# EAGLE board Placa_SecadorDeGraos (EAGLE 9.2.0)
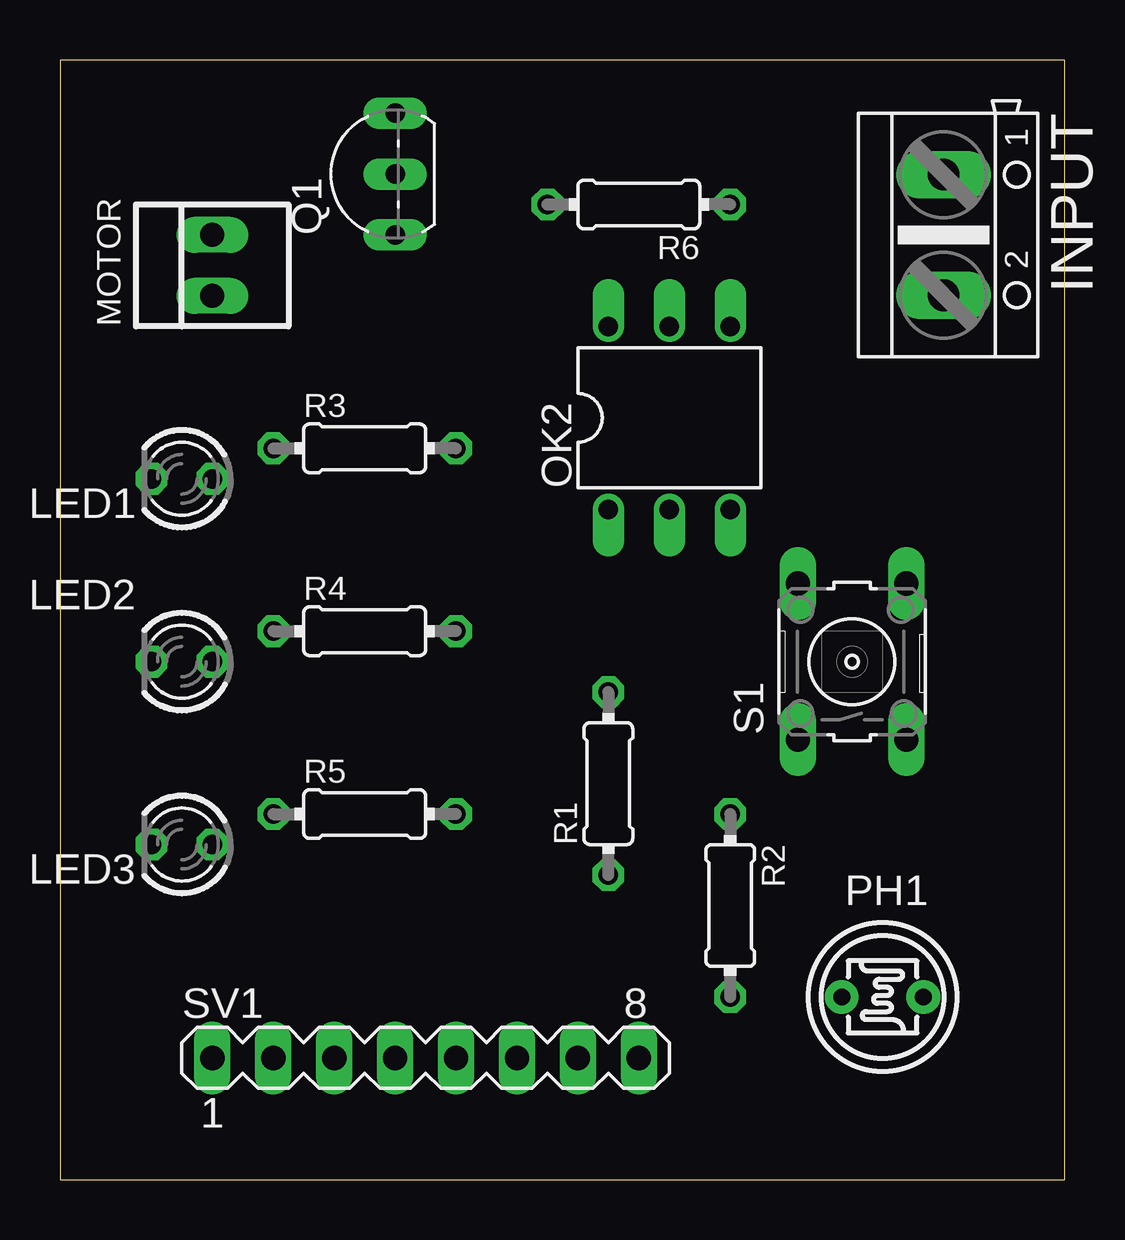
[diagram p0: board, top side]
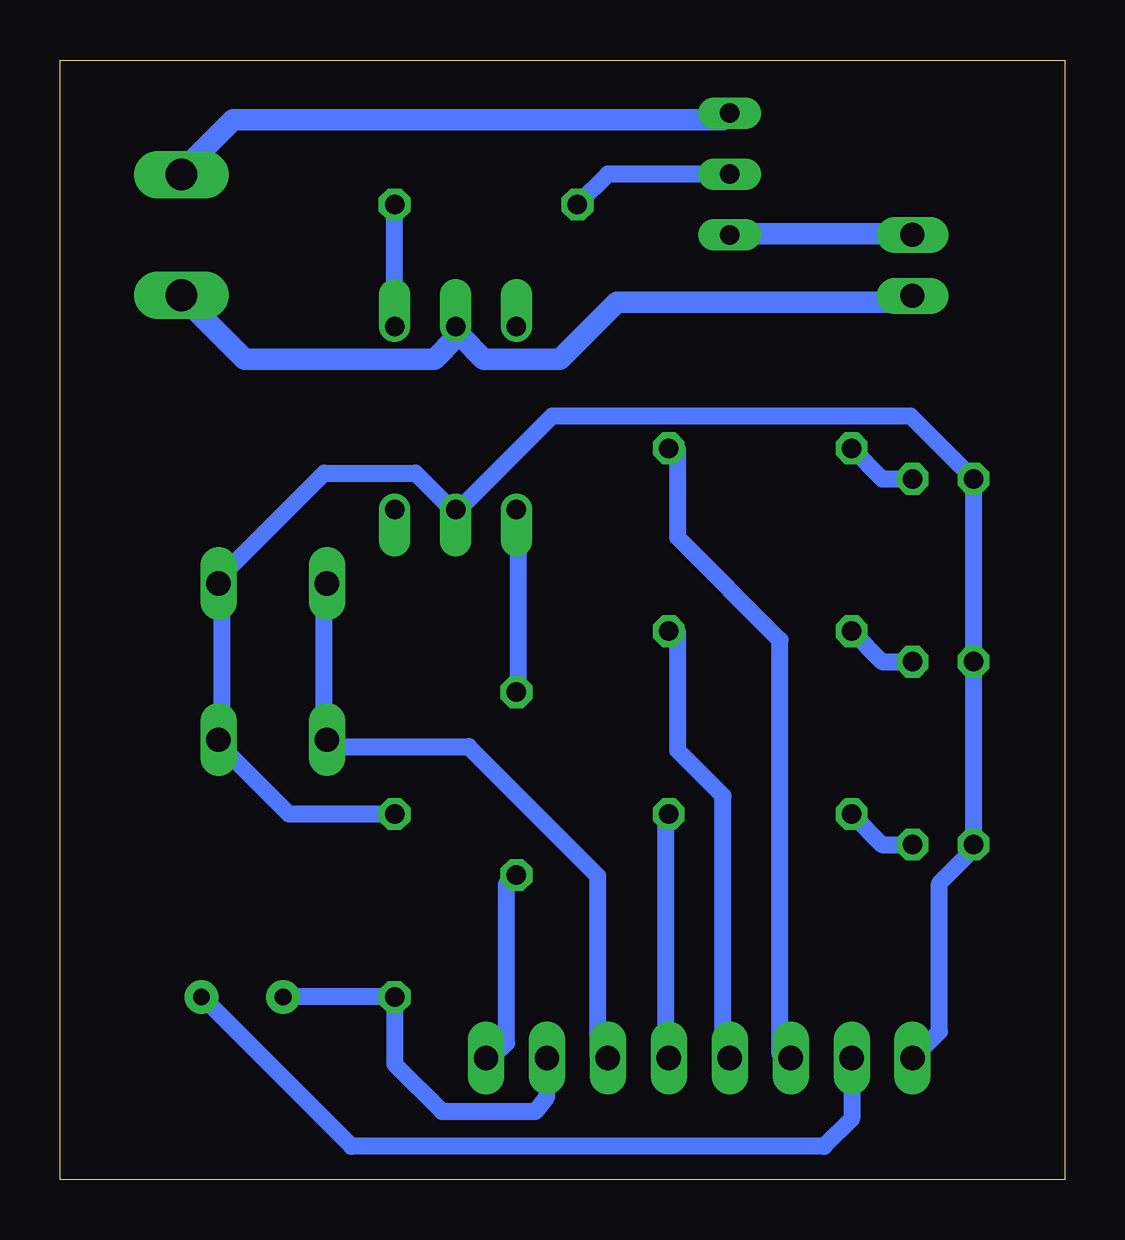
[diagram p1: board, bottom side, seen from below]

Size 41.89 x 46.66 mm. Coordinates in mm from the lower left corner, seen from the top.
Outline: 0,0 41.89,0 41.89,46.66 0,46.66 0,0
Copper layers (1*16): Top 0.035mm / dielectric 1.5mm / Bottom 0.035mm
Design rules "default *": minimum track width 0.7mm, minimum drill 0.7mm, track to track 0.25mm, track to pad 6mil, pad to pad 6mil, via to via 6mil, smd to smd 6mil, copper to edge 40mil, drill to drill 6mil, minimum pad ring 10mil, minimum via ring 8mil, stop-mask expansion 4mil, vias tented up to drill 0mil, thermal gap 10mil

## Footprints (pad centres in the part's own frame; a part is rotated, then mirrored left to right if it is on the bottom)
AK500/2 = drill 1.321 long: 1 -2.515,0; 2 2.515,0
LED3MM = drill 0.813 octagon: A -1.27,0; K 1.27,0
22-23-2021 = drill 1 long: 1 -1.27,0; 2 1.27,0
DIL06 = drill 0.813 offset: 1 -2.54,-3.81; 2 0,-3.81; 3 2.54,-3.81; 4 2.54,3.81; 5 0,3.81; 6 -2.54,3.81
T0-46-A10XX = drill 0.7 pad 1.4: 1 -1.7,0; 2 1.7,0
TO92-EBC = drill 0.813 long: B 0,-1.27; C -2.54,-1.27; E 2.54,-1.27
0204/7 = drill 0.813 octagon: 1 -3.81,0; 2 3.81,0
B3F-10XX = drill 1.016 long: 1 -3.251,2.261; 2 3.251,2.261; 3 -3.251,-2.261; 4 3.251,-2.261
MA08-1 = drill 1.016 long: 1 -8.89,0; 2 -6.35,0; 3 -3.81,0; 4 -1.27,0; 5 1.27,0; 6 3.81,0; 7 6.35,0; 8 8.89,0

## Placement (x,y rotation side)
INPUT  [AK500/2]  36.83,39.37 270 top
LED1  TLLG4400  [LED3MM]  5.08,29.21 180 top
LED2  TLLG4400  [LED3MM]  5.08,21.59 180 top
LED3  TLLG4400  [LED3MM]  5.08,13.97 180 top
MOTOR  22-23-2021  [22-23-2021]  6.35,38.1 90 top
OK2  4N35  [DIL06]  25.4,31.75 0 top
PH1  A1050_09  [T0-46-A10XX]  34.29,7.62 180 top
Q1  BC548  [TO92-EBC]  12.7,41.91 90 top
R1  [0204/7]  22.86,16.51 90 top
R2  [0204/7]  27.94,11.43 270 top
R3  [0204/7]  12.7,30.48 0 top
R4  [0204/7]  12.7,22.86 0 top
R5  [0204/7]  12.7,15.24 0 top
R6  [0204/7]  24.13,40.64 180 top
S1  [B3F-10XX]  33.02,21.59 90 top
SV1  [MA08-1]  15.24,5.08 0 top

## Library data of the parts
INPUT = con-ptr500; OC_FARNELL: unknown; OC_NEWARK: unknown
LED1-LED3 = led; MF: VISHAY SEMICONDUCTOR; OC_FARNELL: 1612435
MOTOR = con-molex; MF: MOLEX; MPN: 22-23-2021; OC_FARNELL: 1462926; OC_NEWARK: 25C3832
OK2 = optocoupler; MF: FAIRCHILD SEMICONDUCTOR; MPN: 4N35; OC_FARNELL: 1328375; OC_NEWARK: 72K9946
PH1 = photo-elements
Q1 = transistor-npn
R1-R6 = rcl; SPICEPREFIX: R
S1 = switch-omron; MPN: B3F-1000; OC_FARNELL: 176432; OC_NEWARK: 36M3542
SV1 = con-lstb; OC_FARNELL: unknown; OC_NEWARK: unknown

## Nets
+5V: PH1.1 SV1.2
CH1: S1.1 S1.2 SV1.6
DRV: R1.1 SV1.8
GND: LED1.K LED2.K LED3.K OK2.2 R2.1 S1.3 S1.4 SV1.1
L1: R3.2 SV1.3
L2: R4.2 SV1.4
L3: R5.2 SV1.5
LDR: PH1.2 R2.2 SV1.7
N$1: LED1.A R3.1
N$2: LED2.A R4.1
N$3: LED3.A R5.1
N$4: MOTOR.2 Q1.C
N$5: OK2.1 R1.2
N$6: Q1.B R6.2
N$7: OK2.4 R6.1
N$8: INPUT.2 MOTOR.1 OK2.5
N$10: INPUT.1 Q1.E

## Tracks (layer width: path | path; a pad name or v marks a point on that pad's centre or on a via)
+5V
  Bottom 0.7: PH1.1 35.62,7.6 35.95,7.6 29.74,1.39 10.04,1.39 8.89,2.54 SV1.2
CH1
  Bottom 0.7: SV1.6 19.48,5.22 19.48,12.67 24.86,18.05 30.4,18.05 S1.1 30.88,18.52 30.88,24.7 S1.2
DRV
  Bottom 0.7: R1.1 23.27,12.35 23.27,5.7 23.75,5.22 SV1.8
GND
  Bottom 0.7: SV1.1 6.17,5.22 5.22,6.17 5.22,12.35 3.81,13.77 LED3.K LED2.K LED1.K 6.42,31.82 21.38,31.82 25.18,28.02 OK2.2 25.65,28.02 27.07,29.45 30.88,29.45 35.15,25.18 S1.4 35.15,24.7 35.15,18.52 S1.3 35.15,18.05 32.34,15.24 R2.1
L1
  Bottom 0.7: R3.2 16.15,30.4 16.15,26.77 11.88,22.49 11.88,5.22 SV1.3
L2
  Bottom 0.7: R4.2 16.15,22.8 16.15,17.89 14.25,15.99 14.25,5.22 SV1.4
L3
  Bottom 0.7: R5.2 16.62,15.2 16.62,5.22 SV1.5
LDR
  Bottom 0.7: SV1.7 21.59,3.47 22.08,2.85 25.97,2.85 27.94,4.82 R2.2 PH1.2
N$1
  Bottom 0.7: R3.1 7.62,29.21 LED1.A
N$2
  Bottom 0.7: R4.1 7.62,21.59 LED2.A
N$3
  Bottom 0.7: R5.1 7.62,13.97 LED3.A
N$4
  Bottom 0.7: 13.78,39.42 Q1.C | 6.65,39.42 MOTOR.2
  Bottom 0.889: 6.65,39.42 13.78,39.42
N$5
  Bottom 0.7: R1.2 22.8,20.43 22.8,27.55 OK2.1
N$6
  Bottom 0.7: Q1.B 19.05,41.91 R6.2
N$7
  Bottom 0.7: OK2.4 R6.1
N$8
  Bottom 0.7: 36.58,36.58 INPUT.2 | 6.65,36.58 MOTOR.1 | 25.18,35.15 OK2.5
  Bottom 0.813: OK2.5 25.4,35.08
  Bottom 0.889: 25.4,35.08 26.28,34.2 34.2,34.2 36.58,36.58 | 6.65,36.58 18.68,36.58 21.05,34.2 24.23,34.2 25.18,35.15
N$10
  Bottom 0.7: 14.25,44.17 Q1.E | 36.58,42.27 INPUT.1
  Bottom 0.889: 14.25,44.17 34.67,44.17 36.58,42.27